# EAGLE board fsr_endstop_small (EAGLE 6.4)
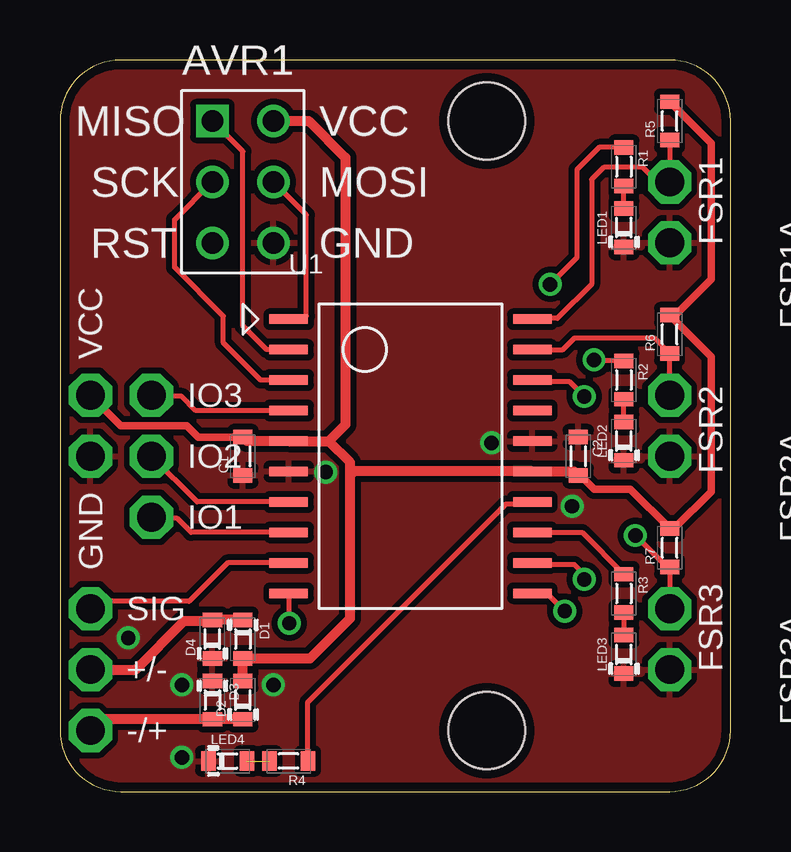
[diagram p0: board, top side]
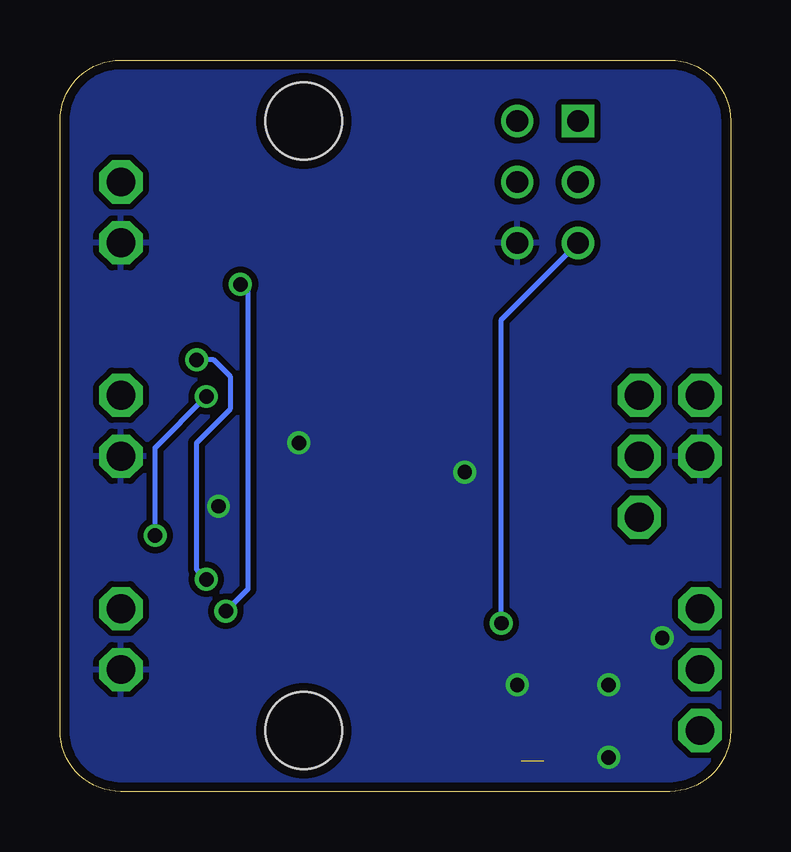
[diagram p1: board, bottom side, seen from below]

Size 27.94 x 30.48 mm. Coordinates in mm from the lower left corner, seen from the top.
Outline: 0,27.94 0,2.54 arc90 2.54,0 25.4,0 arc90 27.94,2.54 27.94,27.94 arc90 25.4,30.48 2.54,30.48 arc90 0,27.94
Copper layers (1*16): Top 0.035559375mm / dielectric 1.501140625mm / Bottom 0.035559375mm
Design rules "LaenPCBOrder": minimum track width 6mil, minimum drill 13mil, track to track 6mil, track to pad 6mil, pad to pad 6mil, via to via 6mil, smd to smd 6mil, copper to edge 15mil, drill to drill 6mil, minimum pad ring 7mil, minimum via ring 7mil, stop-mask expansion 4mil, vias tented up to drill 25mil, thermal gap 10mil
Holes 3.2 mm at 17.78,2.54 17.78,27.94

## Footprints (pad centres in the part's own frame; a part is rotated, then mirrored left to right if it is on the bottom)
PIN_1.2MM = drill 1.2 octagon: P$1 0,0
AVR6 = drill 0.9 square: P$1 -1.27,2.54 | drill 0.9: P$2 1.27,2.54; P$3 -1.27,0; P$4 1.27,0; P$5 -1.27,-2.54; P$6 1.27,-2.54
0603 = smd 0.6 x 0.8: 1 -0.8,0; 2 0.8,0
0603_DIODE = smd 0.6 x 0.8: + 0.8,0; - -0.8,0
SOIC-20 = smd 1.6 x 0.4: P$1 -5.08,5.715; P$2 -5.08,4.445; P$3 -5.08,3.175; P$4 -5.08,1.905; P$5 -5.08,0.635; P$6 -5.08,-0.635; P$7 -5.08,-1.905; P$8 -5.08,-3.175; P$9 -5.08,-4.445; P$10 -5.08,-5.715; P$11 5.08,-5.715; P$12 5.08,-4.445; P$13 5.08,-3.175; P$14 5.08,-1.905; P$15 5.08,-0.635; P$16 5.08,0.635; P$17 5.08,1.905; P$18 5.08,3.175; P$19 5.08,4.445; P$20 5.08,5.715

## Placement (x,y rotation side)
+/-  PIN1.2MM  [PIN_1.2MM]  1.27,5.08 0 top
-/+  PIN1.2MM  [PIN_1.2MM]  1.27,2.54 0 top
AVR1  AVR6  [AVR6]  7.62,25.4 0 top
C1  1uF  [0603]  7.62,13.97 90 top
C2  1uF  [0603]  21.59,13.97 270 top
D1  [0603_DIODE]  7.62,6.35 270 top
D2  [0603_DIODE]  7.62,3.81 90 top
D3  [0603_DIODE]  6.35,3.81 270 top
D4  [0603_DIODE]  6.35,6.35 90 top
FSR1  PIN1.2MM  [PIN_1.2MM]  25.4,25.4 180 top
FSR1A  PIN1.2MM  [PIN_1.2MM]  25.4,22.86 180 top
FSR2  PIN1.2MM  [PIN_1.2MM]  25.4,16.51 180 top
FSR2A  PIN1.2MM  [PIN_1.2MM]  25.4,13.97 180 top
FSR3  PIN1.2MM  [PIN_1.2MM]  25.4,7.62 180 top
FSR3A  PIN1.2MM  [PIN_1.2MM]  25.4,5.08 180 top
GND  PIN1.2MM  [PIN_1.2MM]  1.27,13.97 270 top
IO1  PIN1.2MM  [PIN_1.2MM]  3.81,11.43 0 top
IO2  PIN1.2MM  [PIN_1.2MM]  3.81,13.97 0 top
IO3  PIN1.2MM  [PIN_1.2MM]  3.81,16.51 0 top
LED1  LED0603  [0603_DIODE]  23.5,23.5 90 top
LED2  LED0603  [0603_DIODE]  23.5,14.61 90 top
LED3  LED0603  [0603_DIODE]  23.5,5.71 90 top
LED4  LED0603  [0603_DIODE]  6.98,1.27 0 top
R1  [0603]  23.5,26.04 270 top
R2  [0603]  23.5,17.14 270 top
R3  [0603]  23.5,8.25 270 top
R4  [0603]  9.53,1.27 180 top
R5  10k  [0603]  25.4,27.94 90 top
R6  10k  [0603]  25.4,19.05 90 top
R7  10k  [0603]  25.4,10.16 90 top
SIG  PIN1.2MM  [PIN_1.2MM]  1.27,7.62 0 top
U1  ATTINY461  [SOIC-20]  14.61,13.97 0 top
VCC  PIN1.2MM  [PIN_1.2MM]  1.27,16.51 90 top

## Library data of the parts
+/- -/+ C1 C2 D1-D4 FSR1 FSR1A FSR2 FSR2A FSR3 FSR3A GND IO1-IO3 LED1-LED4 R1-R7 SIG VCC = _sg_lib
AVR1 U1 = _sg_misc

## Nets
GND: AVR1.P$6 C1.1 C2.1 D3.- D4.- FSR1A.P$1 FSR2A.P$1 FSR3A.P$1 GND.P$1 LED1.- LED2.- LED3.- LED4.- U1.P$6 U1.P$16
N$1: AVR1.P$4 U1.P$1
N$2: AVR1.P$1 U1.P$2
N$3: -/+.P$1 D2.- D3.+
N$4: +/-.P$1 D1.- D4.+
N$5: AVR1.P$3 U1.P$3
N$6: AVR1.P$5 U1.P$10
N$7: FSR1.P$1 R5.1 U1.P$20
N$8: FSR2.P$1 R6.1 U1.P$19
N$9: FSR3.P$1 R7.1 U1.P$18
N$10: R4.1 U1.P$14
N$11: R3.1 U1.P$13
N$12: R2.1 U1.P$12
N$13: R1.1 U1.P$11
N$14: SIG.P$1 U1.P$9
N$15: IO3.P$1 U1.P$4
N$16: IO1.P$1 U1.P$8
N$17: IO2.P$1 U1.P$7
N$18: LED1.+ R1.2
N$19: LED2.+ R2.2
N$20: LED3.+ R3.2
N$21: LED4.+ R4.2
V+: AVR1.P$2 C1.2 C2.2 D1.+ D2.+ R5.2 R6.2 R7.2 U1.P$5 U1.P$15 VCC.P$1

## Tracks (layer width: path | path; a pad name or v marks a point on that pad's centre or on a via)
GND  (via drill 0.6)
  other vias: 5.08,4.45 8.89,4.45 11.07,13.31 17.98,14.53 5.08,1.42 21.34,11.89 2.84,6.4
  pour Bottom (isolate 0.254): 1.42,34.44 32.82,34.44 32.82,-3.96 -3.86,-3.96 -3.86,30.07
  pour Top (isolate 0.254): 1.42,36.98 34.44,36.98 34.44,-5.38 -7.21,-5.38 -7.21,31.19
N$1
  Top 0.203: U1.P$1 10.14,19.68 10.26,19.81 10.26,24.03 AVR1.P$4
N$2
  Top 0.203: U1.P$2 8.61,18.41 7.62,19.41 7.62,26.67 AVR1.P$1
N$3
  Top 0.406: D2.- D3.+ 1.74,3.01 -/+.P$1
N$4
  Top 0.406: D1.- D4.+ 6.31,7.11 5.18,7.11 3.15,5.08 +/-.P$1
N$5
  Top 0.203: U1.P$3 8.36,17.14 6.81,18.69 6.81,19.81 4.78,21.84 4.78,23.82 AVR1.P$3
N$6  (via drill 0.6)
  Top 0.203: U1.P$10 9.53,7.04 v9.55,7.01
  Bottom 0.203: v9.55,7.01 9.55,19.66 AVR1.P$5
N$7
  Top 0.203: U1.P$20 19.71,19.71 20.73,19.71 22.15,21.13 22.15,25.5 22.66,26.01 24.28,26.01 24.89,25.4 FSR1.P$1 R5.1
N$8
  Top 0.203: FSR2.P$1 R6.1 24.75,18.9 21.44,18.9 20.96,18.41 U1.P$19
N$9  (via drill 0.6)
  Top 0.203: FSR3.P$1 R7.1 25.29,9.36 v23.98,10.67 | v21.84,16.46 21.23,17.07 19.76,17.07 U1.P$18
  Bottom 0.203: v23.98,10.67 23.98,14.33 v21.84,16.46
N$10
  Top 0.203: R4.1 10.32,3.72 18.59,11.99 19.61,11.99 U1.P$14
N$11
  Top 0.203: U1.P$13 21.75,10.8 R3.1
N$12  (via drill 0.6)
  Top 0.203: R2.1 22.29,17.95 v22.25,17.98 | v21.84,8.84 21.84,9.04 21.44,9.45 19.76,9.45 U1.P$12
  Bottom 0.203: v21.84,8.84 22.25,9.25 22.25,14.53 20.83,15.95 20.83,17.27 21.54,17.98 v22.25,17.98
N$13  (via drill 0.6)
  Top 0.203: R1.1 22.47,26.83 21.54,25.91 21.54,22.25 v20.42,21.13 | v21.03,7.52 20.32,8.23 19.71,8.23 U1.P$11
  Bottom 0.203: v20.42,21.13 20.32,21.13 20.12,20.93 20.12,8.43 v21.03,7.52
N$14
  Top 0.203: U1.P$9 6.98,9.53 5.39,7.93 1.58,7.93 SIG.P$1
N$15
  Top 0.203: U1.P$4 5.66,15.88 5.08,16.46 3.86,16.46 IO3.P$1
N$16
  Top 0.203: U1.P$8 5.46,10.8 4.88,11.38 3.86,11.38 IO1.P$1
N$17
  Top 0.203: U1.P$7 5.71,12.07 IO2.P$1
N$18
  Top 0.203: LED1.+ R1.2
N$19
  Top 0.203: LED2.+ R2.2
N$20
  Top 0.203: R3.2 LED3.+
N$21  (1 unrouted)
V+
  Top 0.305: C1.2 5.75,14.77 5.28,15.24 2.54,15.24 VCC.P$1 | C2.2 21.68,13.17 22.25,12.6 23.76,12.6 R7.2 25.59,10.96 27.13,12.5 27.13,18.12 R6.2 25.64,19.85 27.13,21.34 27.13,27.01 R5.2
  Top 0.406: D2.+ D1.+ 10.43,5.55 12.09,7.21 12.09,13.21 | 12.09,13.21 12.09,13.72 11.2,14.61 | 11.2,14.61 U1.P$5 7.79,14.61 C1.2 | AVR1.P$2 10.36,27.94 11.89,26.42 11.89,15.29 11.2,14.61 | 12.09,13.21 12.22,13.34 U1.P$15 21.43,13.34 C2.2